# Altium PCB DVM1.PcbDoc
Units mm, origin at the board's own origin, x right, y up, seen from the top; angles counter-clockwise.
Board outline 50.04 x 49.91 mm, 4 copper layers (Top Layer, Layer 1, Layer 2, Bottom Layer), stack 0.603 mm thick; 69 components, 40 nets, 195 pads, 121 vias.
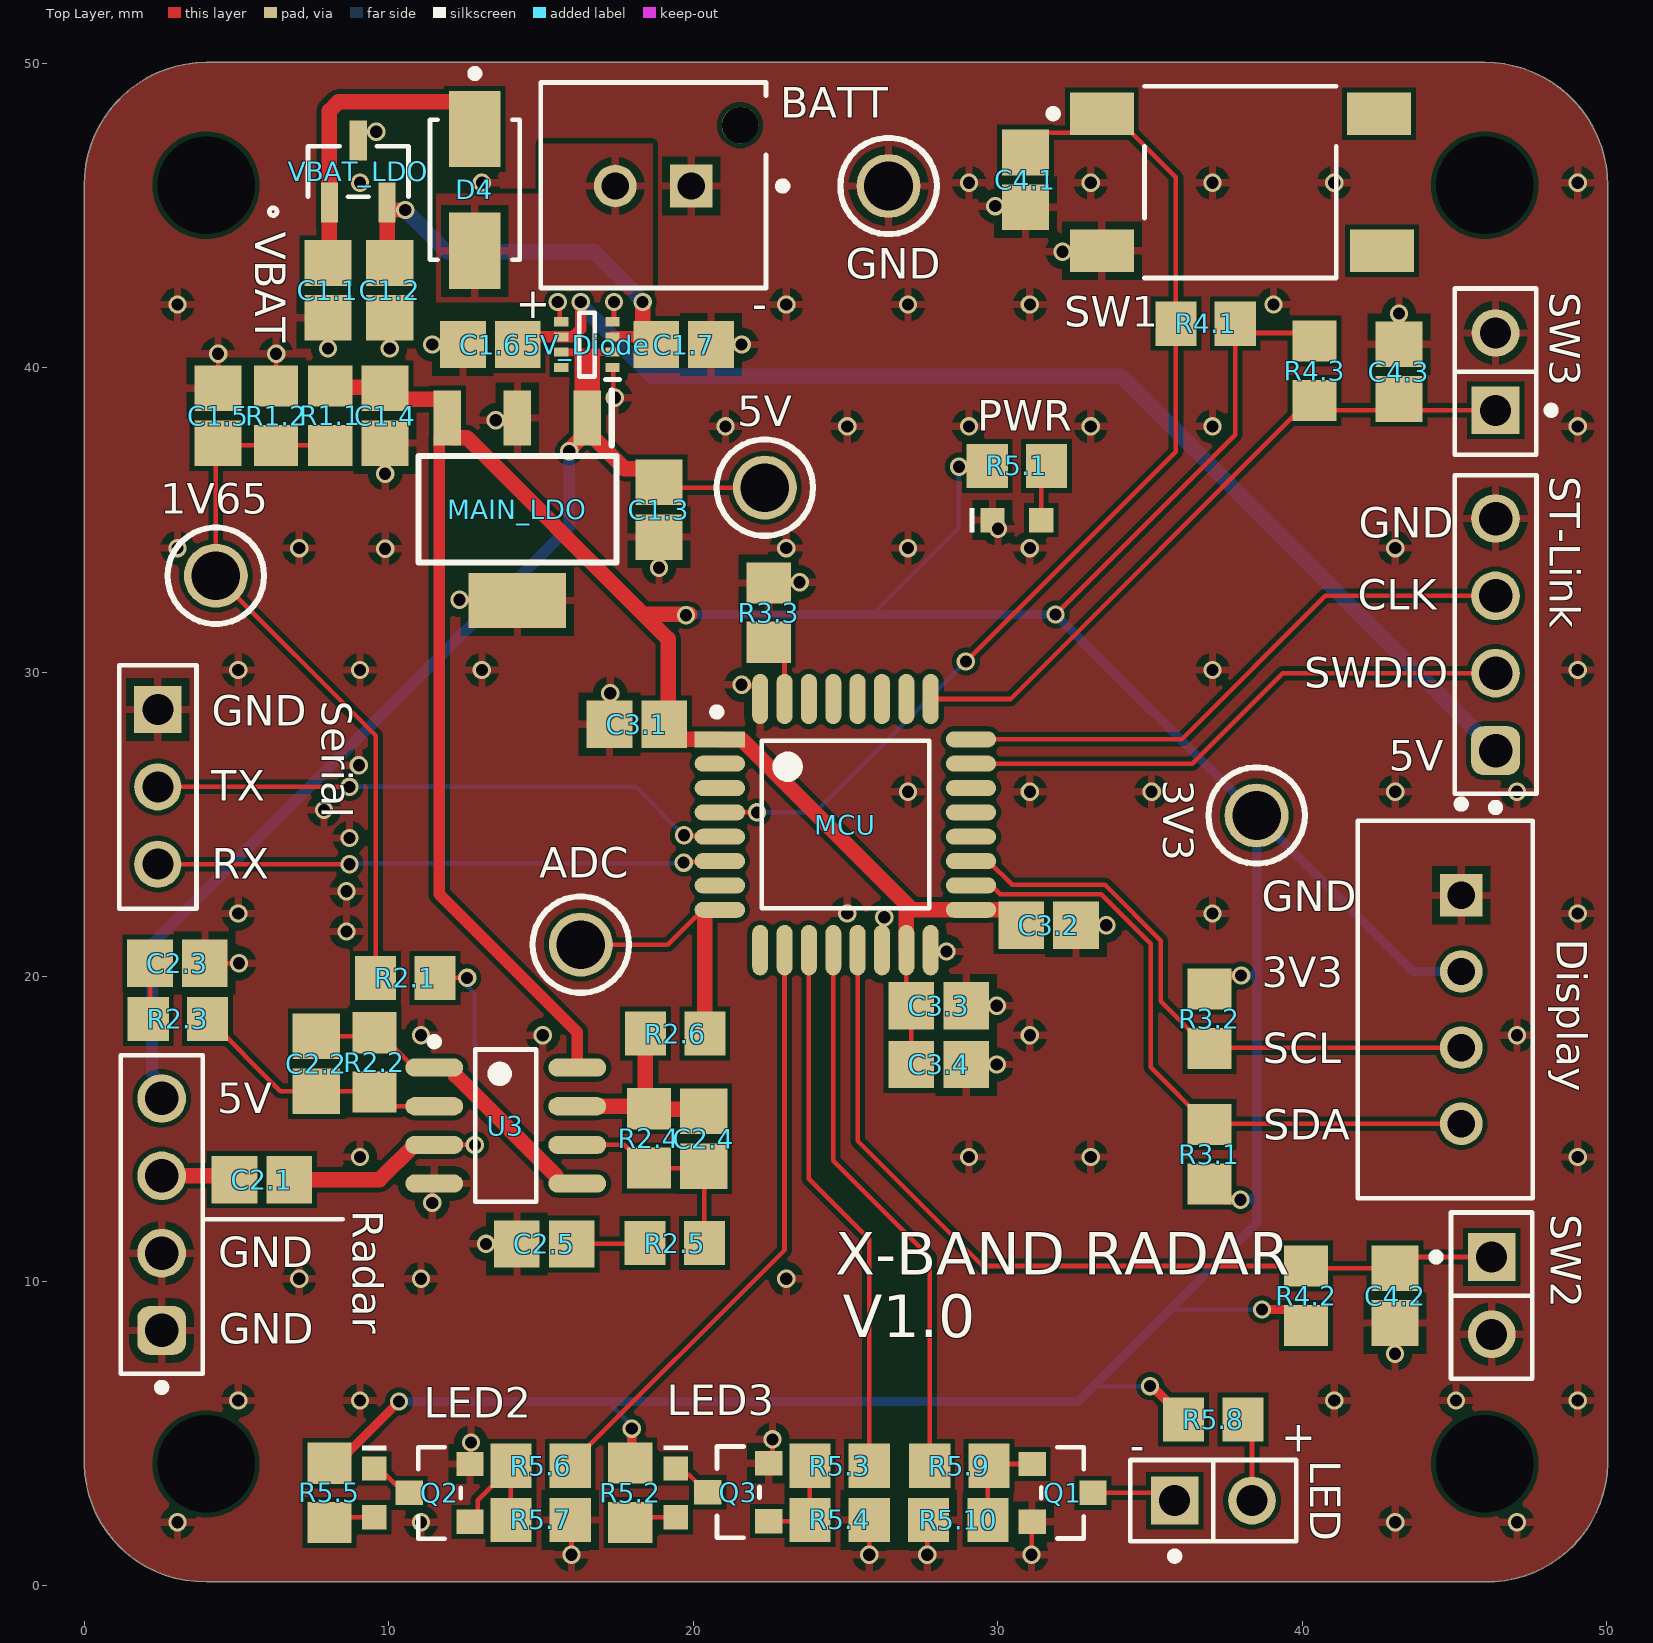
[diagram p0: Top Layer view]
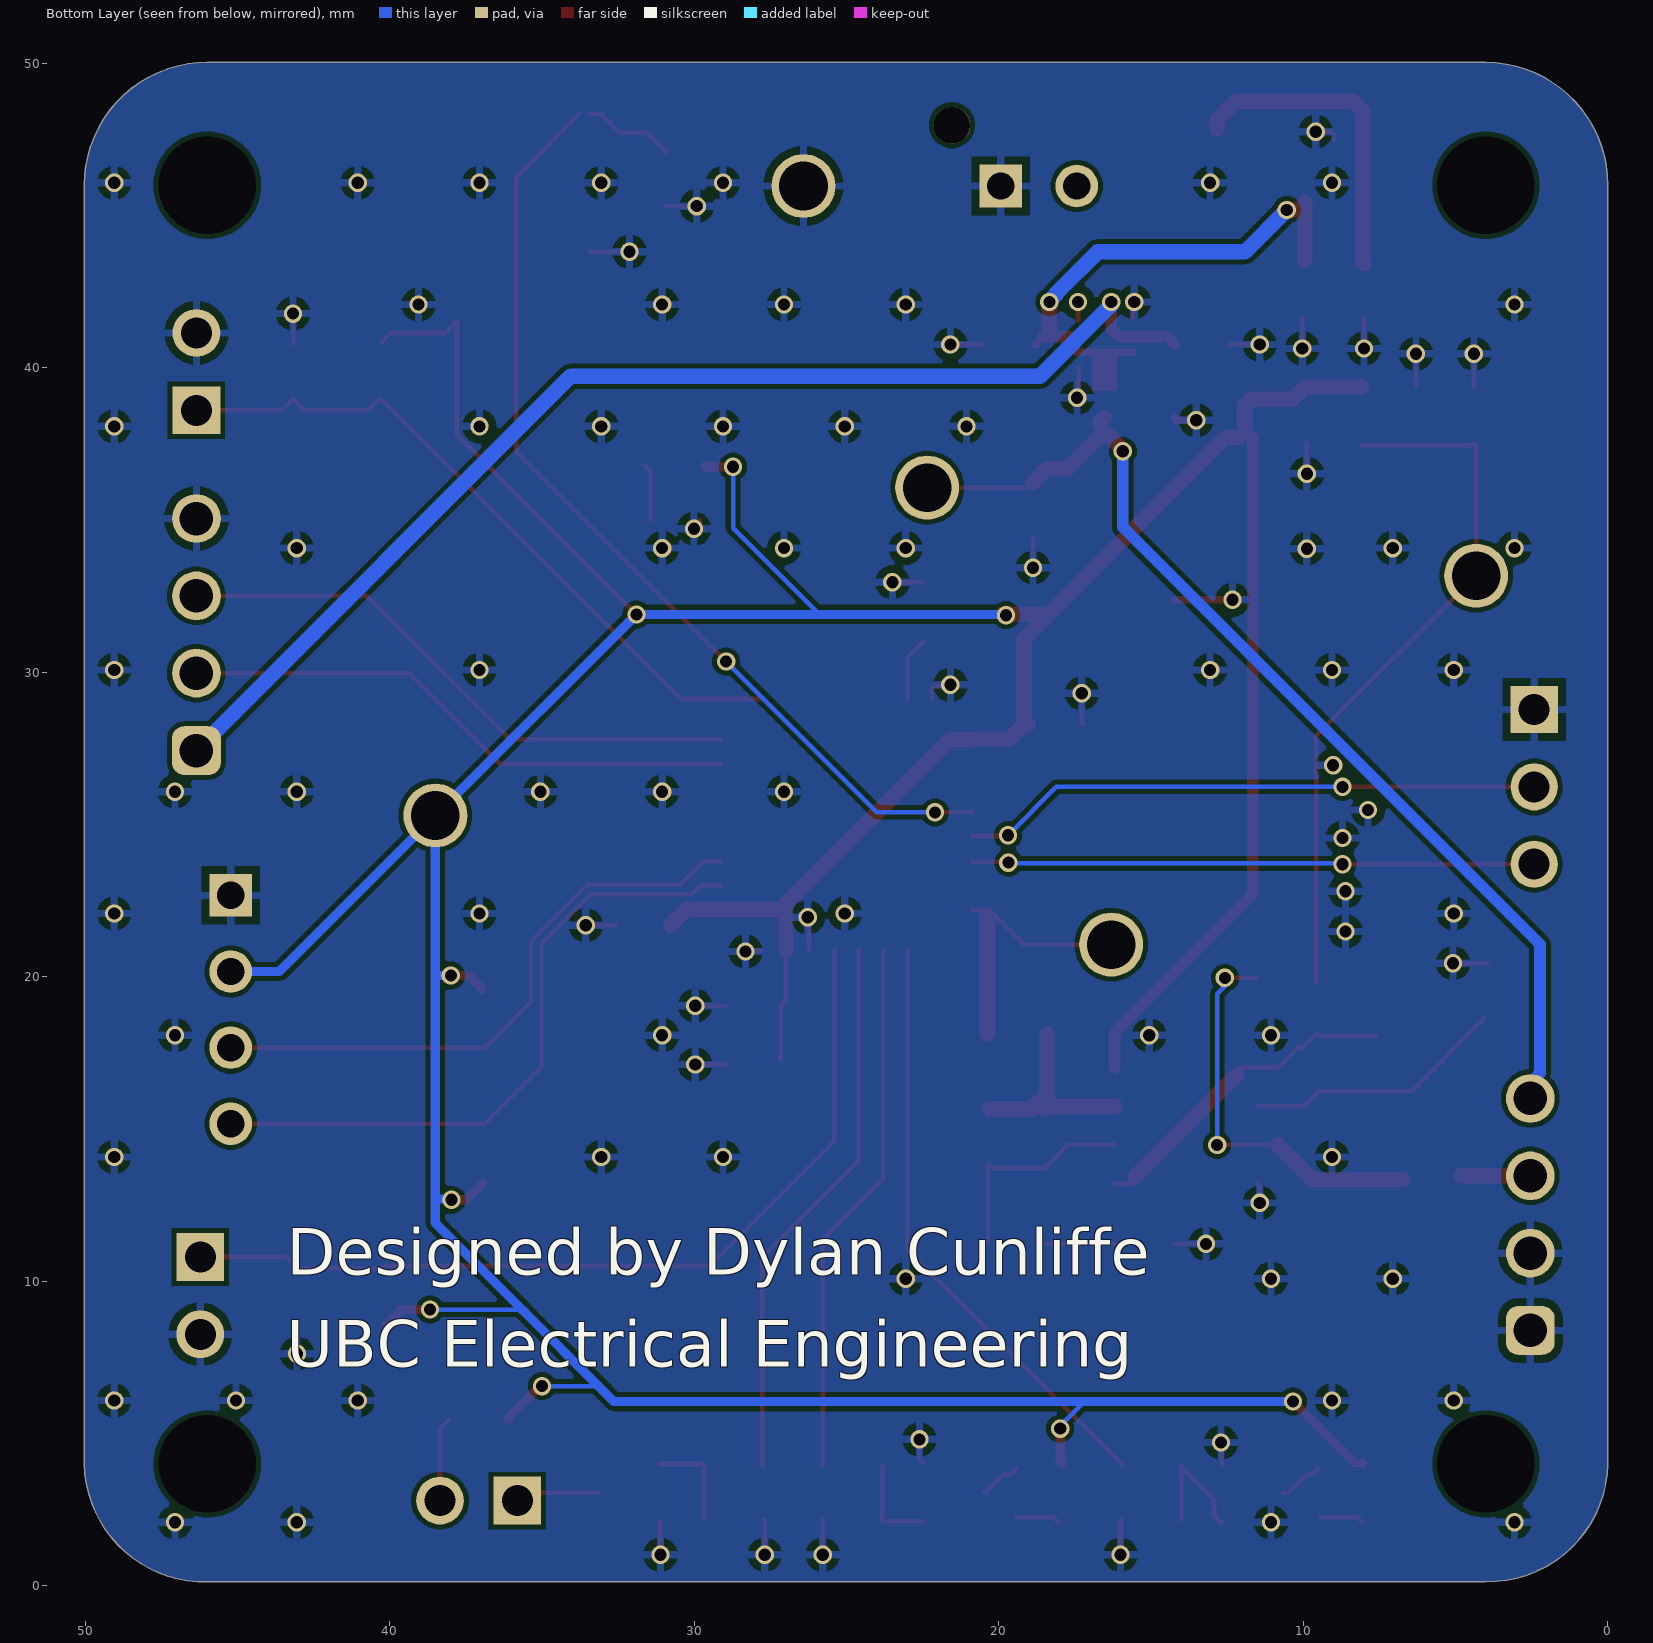
[diagram p1: Bottom Layer view, seen from below]
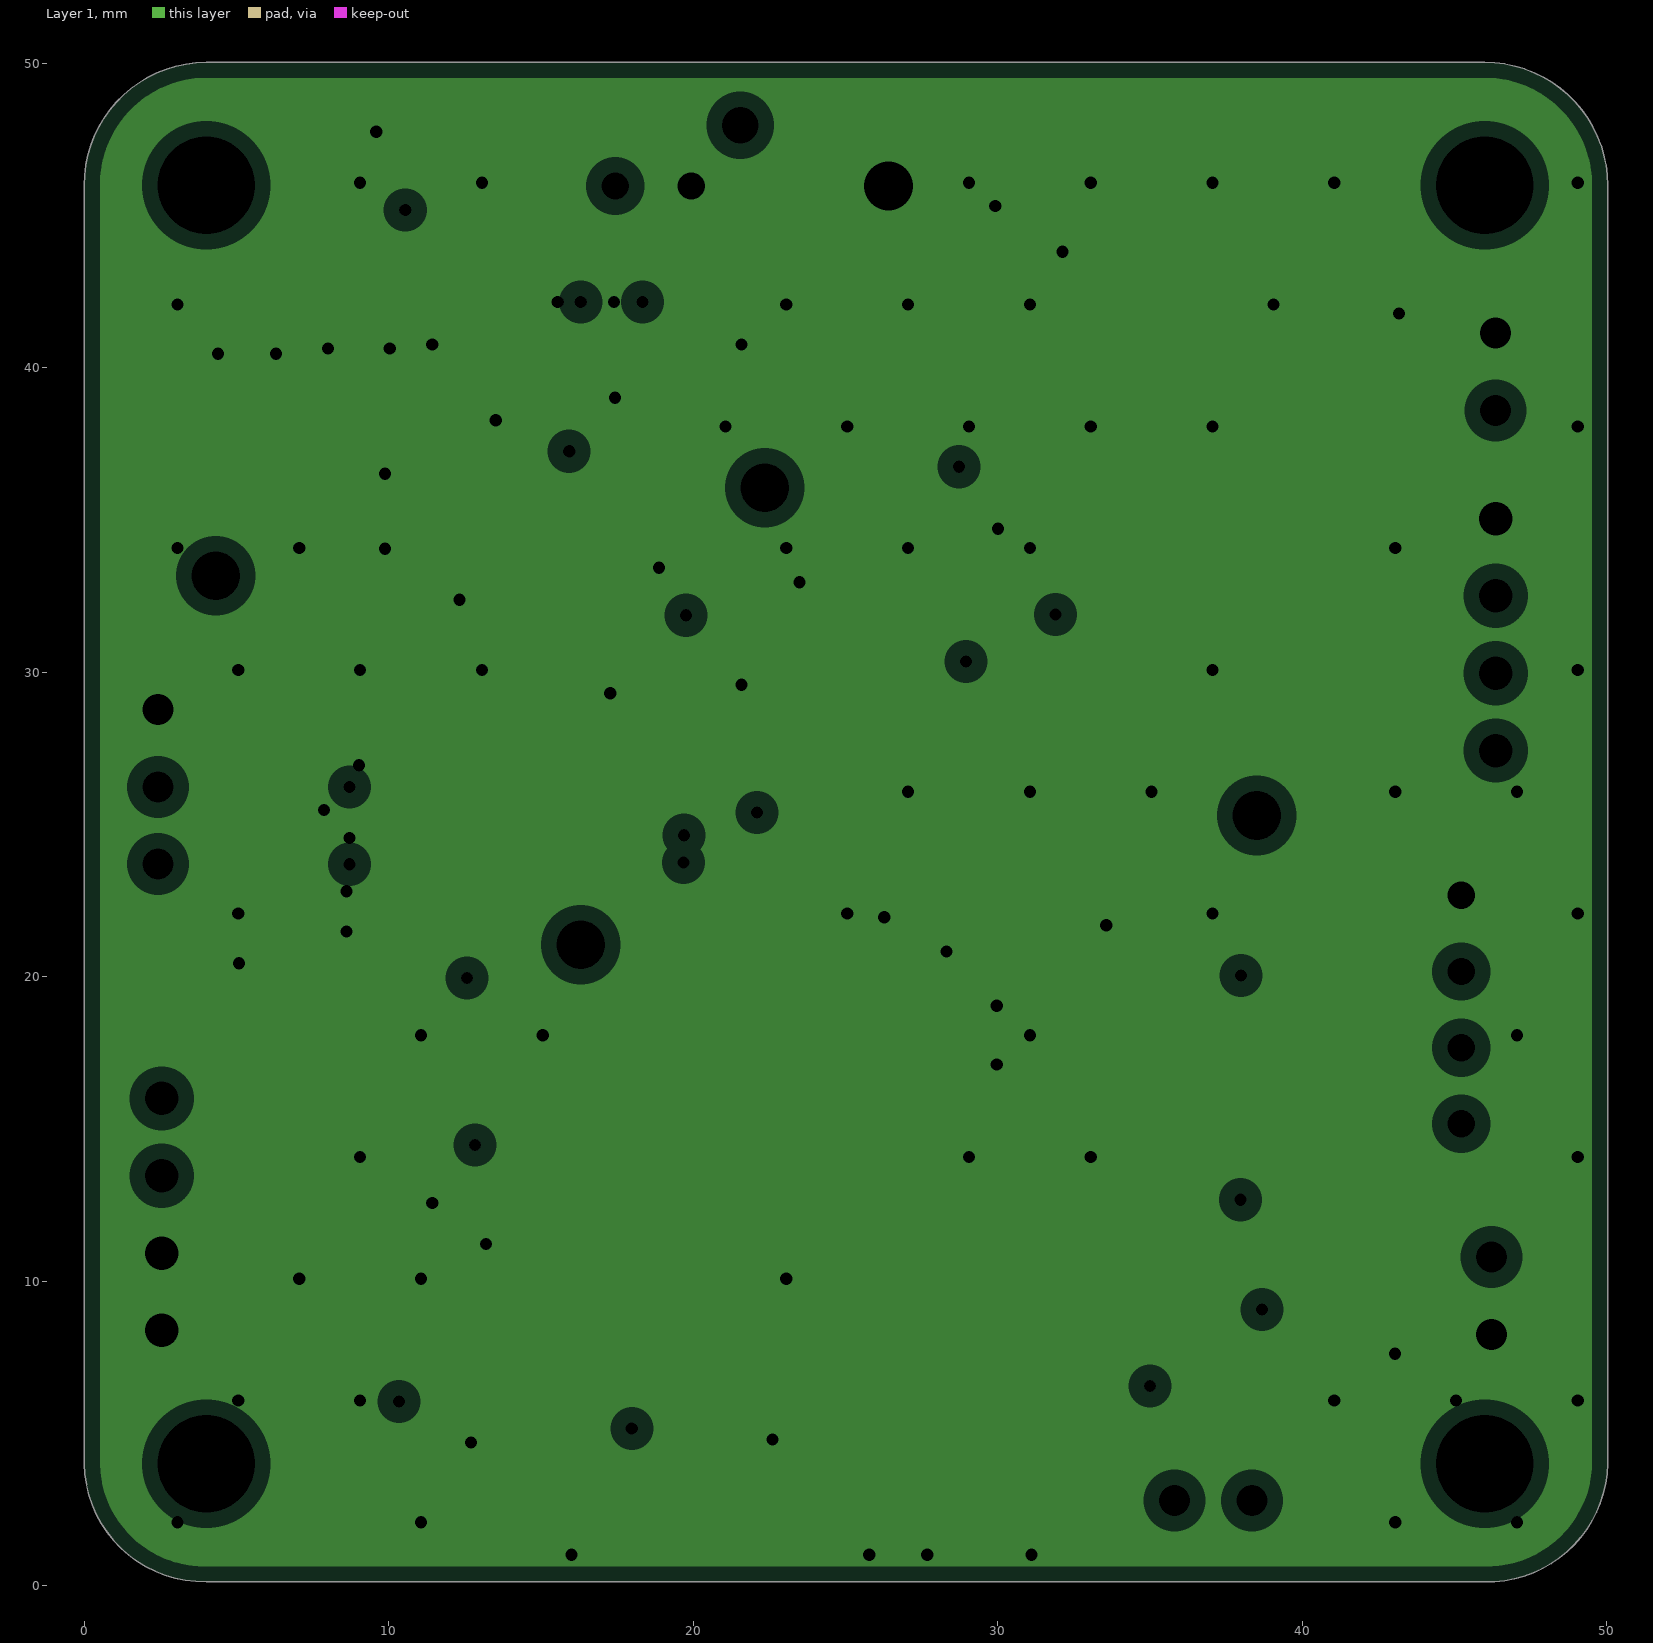
[diagram p2: Layer 1, clearances drawn from the general rule]
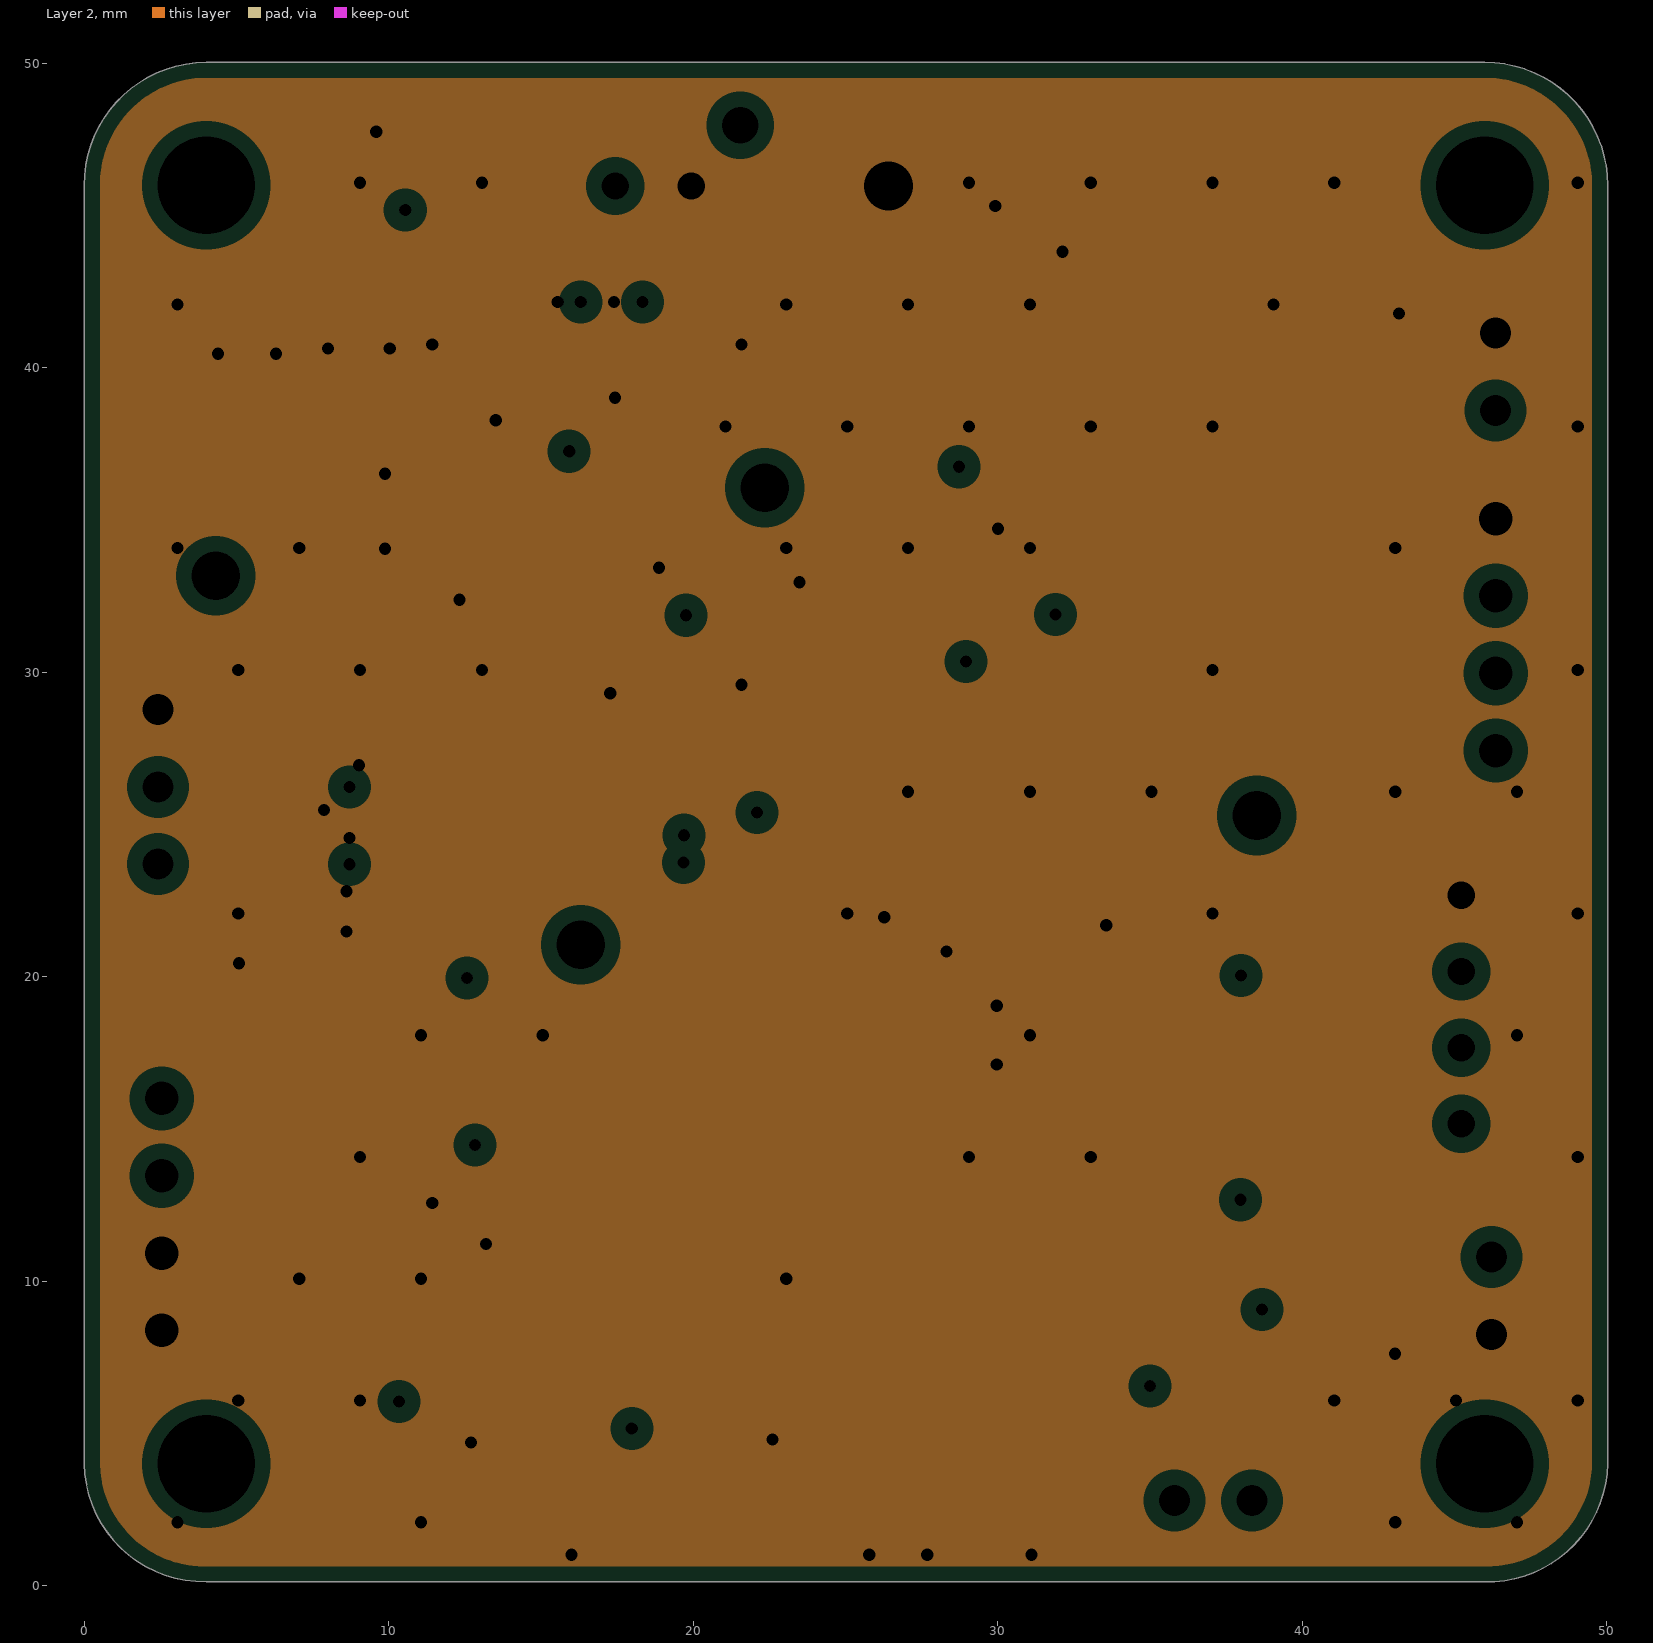
[diagram p3: Layer 2, clearances drawn from the general rule]
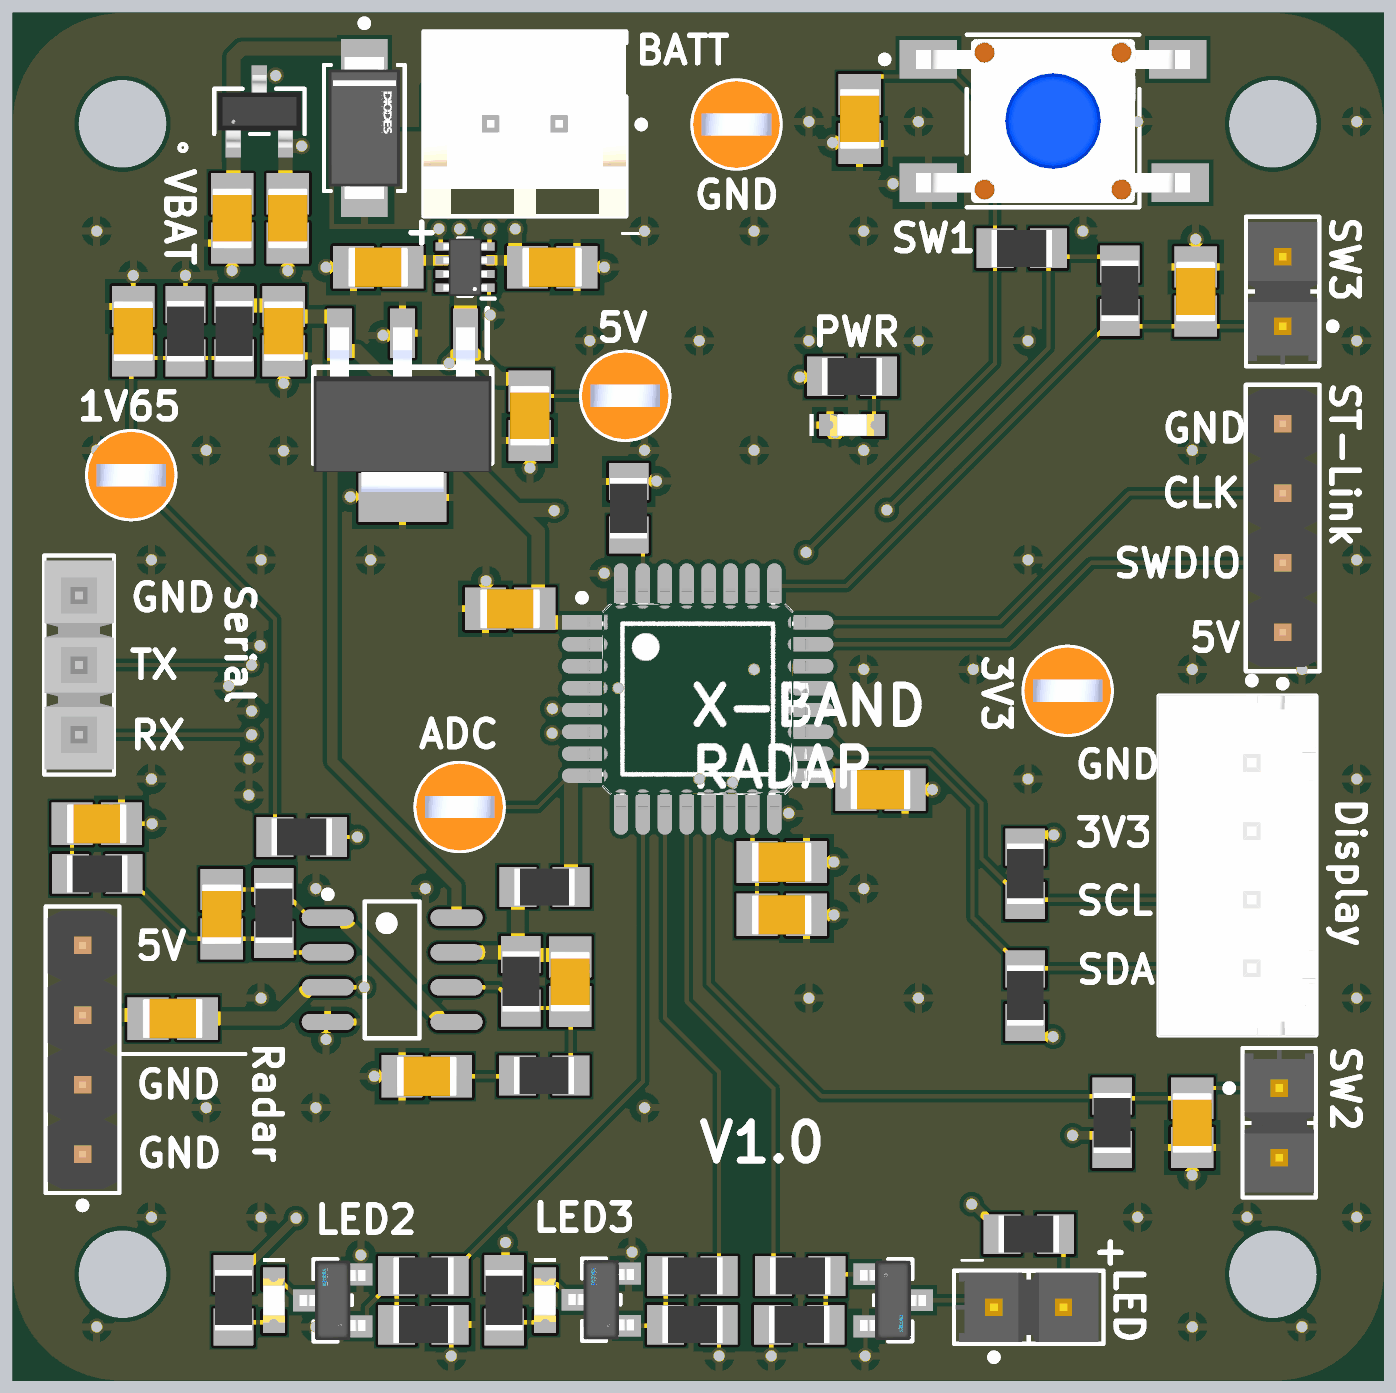
[diagram p4: 3D render of the assembled board from above, using the file's embedded part models]

## Layer stack, top to bottom
Top Solder: solder mask 0.0102, Solder Resist, Dk 3.5
Top Layer: signal copper 0.0356
Dielectric 2: prepreg 0.0711, PP-006, Dk 4.1
Layer 1: plane copper 0.035, net GND
Dielectric 1: dielectric 0.32, FR-4, Dk 4.8
Layer 2: plane copper 0.035, net GND
Dielectric 3: prepreg 0.0711, PP-006, Dk 4.1
Bottom Layer: signal copper 0.0356
Bottom Solder: solder mask 0.0102, Solder Resist, Dk 3.5

## Board outline
0,4 ccw(c3.936,4.063) 4,0.127 46,0.127 ccw(c46.082,4.082) 50.038,4 50.038,46 ccw(c46,46) 46,50.038 4,50.038 ccw(c4.019,46.019) 0,46

## Design rules (kind name [scope] priority, off if disabled: settings)
Clearance [All] p1: gap=0.152 ignorepadtopadclearanceinfootprint=FALSE
HoleSize [All] p1: absolutevalues=TRUE maxlimit=10 minlimit=0.025 maxpercent=80.000 minpercent=20.000
MinimumSolderMaskSliver [All] p1: minsoldermaskwidth=0.08
PlaneClearance [All] p1: clearance=0.508
PlaneConnect [All] p1: planeconnectstyle=Relief reliefexpansion=0.508 reliefentries=4 reliefconductorwidth=0.254 reliefairgap=0.254
PolygonConnect [All] p1: connectstyle=Relief reliefconductorwidth=0.254 reliefentries=4 polygonreliefangle="90 Angle" airgapwidth=0.254
RoutingVias [All] p1: holewidth=0.3 width=0.6 viastyle="Through Hole" minholewidth=0.711 minwidth=1.27 maxholewidth=3.2 maxwidth=4
SilkToSolderMaskClearance [IsPad] p1: minsilkscreentomaskgap=0.15 clearancetoexposedcopper=TRUE
SolderMaskExpansion [All] p1: expansion=0.102 istentingtop=FALSE
SupplyNets "Schematic Supply Nets_4" [InNet('+3.3')] p1: voltage=0.000
SupplyNets "Schematic Supply Nets_3" [InNet('+5')] p2: voltage=0.000
SupplyNets "Schematic Supply Nets_2" [InNet('GND')] p3: voltage=0.000
SupplyNets "Schematic Supply Nets_1" [InNet('VBAT')] p4: voltage=0.000
SupplyNets "Schematic Supply Nets" [InNet('+1.65')] p5: voltage=0.000
Width [All] p1: maxlimit=0.508 minlimit=0.127 preferedwidth=0.305
25 further rules are at their usual default settings.

## Components (designator, comment, footprint, x,y, rotation, side; value= is the part's Value field where it differs from the comment)
1V65 "5013" KSTN-5013_V 4.318,33.172 r180 top (schematic designator 1.65V)
3V3 "5013" KSTN-5013_V 38.506,25.298 r0 top (schematic designator 3.3V)
5V "5013" KSTN-5013_V 22.352,36.068 r0 top
5V_Diode "LM66200DRLR" LM66200DRLR-Footprint-1 16.51,40.767 r180 top
ADC "5013" KSTN-5013_V 16.307,21.057 r0 top
BATT "BH2B-XH-2(LF)(SN)" FP-BH2B-XH-2_LF_SN-MFG 18.689,45.999 r0 top
C1.1 "CAP-NP-2" CAPC2013X145X50ML20T25 8.001,42.545 r90 top value=1µF
C1.2 "CAP-NP-2" CAPC2013X145X50ML20T25 10.033,42.545 r90 top value=1µF
C1.3 "CAP-NP-2" CAPC2013X145X50ML20T25 18.872,35.342 r90 top value=1µF
C1.4 "CAP-NP-2" CAPC2013X145X50ML20T25 9.881,38.43 r90 top value=1µF
C1.5 "CAP-NP-2" CAPC2013X145X50ML20T25 4.394,38.43 r270 top value=10µF
C1.6 "CAP-NP-2" CAPC2013X145X50ML20T25 13.335,40.767 r0 top value=1µF
C1.7 "CAP-NP-2" CAPC2013X145X50ML20T25 19.685,40.767 r180 top value=1µF
C2.1 "CAP-NP-2" CAPC2013X145X50ML20T25 5.831,13.335 r180 top value=0.1µF
C2.2 "CAP-NP-2" CAPC2013X145X50ML20T25 7.62,17.145 r270 top value=270pF
C2.3 "CAP-NP-2" CAPC2013X145X50ML20T25 3.059,20.447 r0 top value=10µF
C2.4 "CAP-NP-2" CAPC2013X145X50ML20T25 20.345,14.681 r270 top value=270pF
C2.5 "CAP-NP-2" CAPC2013X145X50ML20T25 15.108,11.227 r180 top value=10µF
C3.1 "CAP-NP-2" CAPC2013X145X50ML20T25 18.15,28.296 r180 top value=0.1µF
C3.2 "CAP-NP-2" CAPC2013X145X50ML20T25 31.674,21.692 r0 top value=0.1µF
C3.3 "CAP-NP-2" CAPC2013X145X50ML20T25 28.067,19.05 r0 top value=0.1µF
C3.4 "CAP-NP-2" CAPC2013X145X50ML20T25 28.067,17.12 r0 top value=1µF
C4.1 "CAP-NP-2" CAPC2013X145X50ML20T25 30.912,46.177 r270 top value=0.1µF
C4.2 "CAP-NP-2" CAPC2013X145X50ML20T25 43.053,9.525 r270 top value=0.1µF
C4.3 "CAP-NP-2" CAPC2013X145X50ML20T25 43.18,39.878 r270 top value=0.1µF
D4 "B140AF-13" FP-SMAF-MFG 12.827,45.847 r270 top
Display "B4B-XH-A(LF)(SN)" FP-B4B-XH-A_LF_SN-MFG 44.704,18.923 r90 top
GND "5013" KSTN-5013_V 26.416,45.974 r180 top (schematic designator Ground)
LED "TSW-102-14-G-S" FP-TSW-102-14-G-S-MFG 37.084,2.794 r0 top
LED2 "150060VS75000" WL-SMCW_0603_150060xx75000 9.525,3.046 r270 top
LED3 "150060VS75000" WL-SMCW_0603_150060xx75000 19.431,3.048 r270 top
MAIN_LDO "AP7361EA-33ER-13" AP7361EA-33ER-13-Footprint-1 14.224,35.357 r270 top (schematic designator *)
MCU "STM32G431KBT6" FP-LQFP32-5V-IPC_B 25,25 r0 top
PWR "150060VS75000" WL-SMCW_0603_150060xx75000 30.632,35.001 r0 top (schematic designator Power)
Q1 "DMN3023L-7" FP-SOT23-MFG 32.131,3.048 r0 top
Q2 "DMN3023L-7" FP-SOT23-MFG 11.668,3.046 r180 top
Q3 "DMN3023L-7" FP-SOT23-MFG 21.479,3.069 r180 top
R1.1 "RES-2" RESC2013X70X40ML20T20 8.077,38.43 r270 top value=10k
R1.2 "RES-2" RESC2013X70X40ML20T20 6.299,38.43 r270 top value=10k
R2.1 "RES-2" RESC2013X70X40ML20T20 10.541,19.964 r180 top value=16.2k
R2.2 "RES-2" RESC2013X70X40ML20T20 9.525,17.186 r90 top value=174k
R2.3 "RES-2" RESC2013X70X40ML20T20 3.073,18.618 r0 top value=1k
R2.4 "RES-2" RESC2013X70X40ML20T20 18.542,14.691 r90 top value=174k
R2.5 "RES-2" RESC2013X70X40ML20T20 19.39,11.252 r0 top value=1k
R2.6 "RES-2" RESC2013X70X40ML20T20 19.406,18.136 r180 top value=1k
R3.1 "RES-2" RESC2013X70X40ML20T20 36.957,14.173 r90 top value=4.7k
R3.2 "RES-2" RESC2013X70X40ML20T20 36.957,18.618 r90 top value=4.7k
R3.3 "RES-2" RESC2013X70X40ML20T20 22.479,31.963 r270 top value=10k
R4.1 "RES-2" RESC2013X70X40ML20T20 36.83,41.453 r180 top value=10k
R4.2 "RES-2" RESC2013X70X40ML20T20 40.132,9.525 r270 top value=10k
R4.3 "RES-2" RESC2013X70X40ML20T20 40.411,39.903 r270 top value=10k
R5.1 "RES-2" RESC2013X70X40ML20T20 30.632,36.779 r0 top value=1k
R5.2 "RES-2" RESC2013X70X40ML20T20 17.932,3.048 r270 top value=330
R5.3 "RES-2" RESC2013X70X40ML20T20 24.806,3.936 r180 top value=1k
R5.4 "RES-2" RESC2013X70X40ML20T20 24.806,2.158 r0 top value=10k
R5.5 "RES-2" RESC2013X70X40ML20T20 8.052,3.046 r270 top value=330
R5.6 "RES-2" RESC2013X70X40ML20T20 14.986,3.936 r180 top value=1k
R5.7 "RES-2" RESC2013X70X40ML20T20 14.986,2.158 r0 top value=10k
R5.8 "RES-2" RESC2013X70X40ML20T20 37.084,5.461 r0 top value=330
R5.9 "RES-2" RESC2013X70X40ML20T20 28.743,3.937 r0 top value=1k
R5.10 "RES-2" RESC2013X70X40ML20T20 28.702,2.159 r180 top value=10k
Radar "61300411121" 61300411121 2.54,12.192 r90 top
Serial "TSW-103-07-G-S" SMTC-TSW-103-07-X-S 2.413,28.778 r270 top
ST-Link "61300411121" 61300411121 46.355,31.242 r90 top
SW1 "2-1977223-2" FP-2-1977223-2-MFG 37.973,46.101 r90 top
SW2 "TSW-102-14-G-S" FP-TSW-102-14-G-S-MFG 46.228,9.525 r270 top
SW3 "TSW-102-14-G-S" FP-TSW-102-14-G-S-MFG 46.355,39.878 r90 top
U3 "MCP6002-E/SN" SOIC-SN8_L 13.843,15.113 r0 top
VBAT_LDO "AP7375-50SA-7" SOT23_DIO 8.997,46.453 r0 top

## Footprints (in the part's own frame and the unit in brackets; to place one, negate y for a bottom-side part, rotate by r counter-clockwise, add the part's x,y. Pads: shape width x height; smd on the part's side, far side on the other; paste and mask are expansions set on the pad)
61300411121 [mm] "Pin Header, pitch 2.54 mm, THT, Vertical, single row, 4p"
  rrect50% 1.6x1.6 hole 1.1: 1(-3.81,0)
  round 1.6 hole 1.1: 2(-1.27,0) 3(1.27,0) 4(3.81,0)
  silkscreen extent -5.8,-1.35 5.23,1.35, body extent -5.08,-1.27 5.08,1.27, height 8.57
AP7361EA-33ER-13-Footprint-1 [mm]
  rect 1.8x0.9 smd: 1(-3,2.3) 2(-3,0) 3(-3,-2.3)
  rect 1.8x3.2 smd: 4(3,0)
  silkscreen extent -3.9,-3.25 1.75,3.25, body extent -3.23,-3.25 3.88,3.25, height 1.66
CAPC2013X145X50ML20T25 [mm] "Chip Capacitor, 2-Leads, Body 2.2x1.45mm, IPC Low Density"
  rect 1.5x1.55 smd: 1(-0.9,0) 2(0.9,0)
  body extent -1.1,-0.72 1.1,0.73, height 1.45
FP-2-1977223-2-MFG [mm]
  rect 1.4x2.1 smd paste+0 mask+0: 1(2.25,4.55) 2(2.25,-4.55) 3(-2.25,4.55) 4(-2.25,-4.65)
  silkscreen extent -3.15,-3.15 3.15,6.27, body extent -3.25,-5.8 3.25,5.7, height 0.25
FP-B4B-XH-A_LF_SN-MFG [mm]
  rect 1.4x1.4 hole 0.9 paste-2539.97 mask+0: 1(3.75,-0.525)
  round 1.4 hole 0.9 paste-2539.97 mask+0: 2(1.25,-0.525) 3(-1.25,-0.525) 4(-3.75,-0.525)
  silkscreen extent -6.2,-2.88 6.87,2.88, body extent -6.3,-2.98 6.3,2.98, height 0.25
FP-BH2B-XH-2_LF_SN-MFG [mm]
  rect 1.4x1.4 hole 0.9 paste-2539.97 mask+0: 1(1.25,-0.025)
  round 1.4 hole 0.9 paste-2539.97 mask+0: 2(-1.25,-0.025)
  round 1.2 hole 1.2 unplated paste-2539.97 mask+0: ""(2.85,1.975)
  silkscreen extent -3.7,-3.37 4.38,3.37, body extent -3.8,-3.47 3.8,3.47, height 0.25
FP-LQFP32-5V-IPC_B [mm]
  rect 1.655x0.526 smd paste+0 mask+0: 1(-4.125,2.8)
  rrect100% 1.655x0.526 smd paste+0 mask+0: 2(-4.125,2) 3(-4.125,1.2) 4(-4.125,0.4) 5(-4.125,-0.4) 6(-4.125,-1.2) 7(-4.125,-2) 8(-4.125,-2.8) 17(4.125,-2.8) 18(4.125,-2) 19(4.125,-1.2) 20(4.125,-0.4) 21(4.125,0.4) 22(4.125,1.2) 23(4.125,2) 24(4.125,2.8)
  rrect100% 0.526x1.655 smd paste+0 mask+0: 9(-2.8,-4.125) 10(-2,-4.125) 11(-1.2,-4.125) 12(-0.4,-4.125) 13(0.4,-4.125) 14(1.2,-4.125) 15(2,-4.125) 16(2.8,-4.125) 25(2.8,4.125) 26(2,4.125) 27(1.2,4.125) 28(0.4,4.125) 29(-0.4,4.125) 30(-1.2,4.125) 31(-2,4.125) 32(-2.8,4.125)
  silkscreen extent -4.35,-2.75 2.75,3.82, body extent -5.2,-5.2 5.2,5.2, height 0.25
FP-SMAF-MFG [mm]
  rect 2.5x1.7 smd paste+0 mask+0: 1(-2,0) 2(2,0)
  silkscreen extent -3.95,-1.48 2.3,1.48, body extent -3.35,-1.58 3.35,1.58, height 0.25
FP-SOT23-MFG [mm]
  rect 0.9x0.8 smd paste+0 mask+0: 1(-1,0.95) 2(-1,-0.95) 3(1,0)
  silkscreen extent -0.7,-1.5 0.7,1.5, body extent -1.55,-1.6 1.55,1.6, height 0.25
FP-TSW-102-14-G-S-MFG [mm]
  rect 1.57x1.57 hole 1.02 paste-2539.97 mask+0: 1(-1.27,0)
  round 1.57 hole 1.02 paste-2539.97 mask+0: 2(1.27,0)
  silkscreen extent -2.73,-1.95 2.73,1.34, body extent -2.83,-1.44 2.83,1.44, height 0.25
KSTN-5013_V [mm] "Test Point, Dia 3.17mm"
  round 2.1 hole 1.6: 1(0,0)
  silkscreen extent -1.59,-1.58 1.59,1.58, body extent -1.59,-1.59 1.59,1.59, height 8.13
LM66200DRLR-Footprint-1 [mm]
  rect 0.475x0.3 smd: 1(-0.838,0.75) 2(-0.838,0.25) 3(-0.838,-0.25) 4(-0.838,-0.75) 5(0.838,-0.75) 6(0.838,-0.25) 7(0.838,0.25) 8(0.838,0.75)
  silkscreen extent -1.07,-1.05 0.25,1.15, body extent -0.8,-1.05 0.8,1.05, height 0.61
RESC2013X70X40ML20T20 [mm] "Chip Resistor, 2-Leads, Body 2.2x1.35mm, IPC Low Density"
  rect 1.35x1.45 smd: 1(-0.975,0) 2(0.975,0)
  body extent -1.1,-0.67 1.1,0.67, height 0.7
SMTC-TSW-103-07-X-S [mm] ".025 SQ Post Terminal Strip Assembly, 1x3 Pins, Vertical, 2.54mm Pitch, Male"
  rect 1.55x1.55 hole 1.02: 1(0,0)
  round 1.55 hole 1.02: 2(2.54,0) 3(5.08,0)
  silkscreen extent -1.46,-1.27 6.54,1.27, body extent -1.27,-1.27 6.35,1.27, height 8.38
SOIC-SN8_L [mm] "SOIC, 8-Leads, Body 4.9x3.9mm, Pitch 1.27mm, IPC High Density"
  oval 1.9x0.6 smd: 1(-2.35,1.905) 2(-2.35,0.635) 3(-2.35,-0.635) 4(-2.35,-1.905) 5(2.35,-1.905) 6(2.35,-0.635) 7(2.35,0.635) 8(2.35,1.905)
  silkscreen extent -2.47,-2.5 1,2.88, body extent -2,-2.5 2,2.5, height 1.75
SOT23_DIO [mil]
  rect 22x52 smd paste+0 mask+0: 1(-37.4,-40) 2(37.4,-40) 3(0,40)
  silkscreen extent -115,-57 65,32, body extent -60,-52 60,52, height 44
WL-SMCW_0603_150060xx75000 [mm] "SMD Mono-color Chip LED, body 1.60 x 0.80 mm"
  rect 0.8x0.8 smd: 1(-0.8,0) 2(0.8,0)
  silkscreen extent -1.55,-0.4 -1.4,0.4, body extent -0.8,-0.4 0.8,0.4, height 0.7

## Part data
1V65 3V3 5V ADC GND: library part CMP-1672-00005-4, "Test Point, Orange, Through Hole, RoHS, Bulk", Colour=Orange, Manufacturer=Keystone, Package Quantity=100, ComponentLink1Description="Manufacturer URL", ComponentLink1URL=http://www.keyelco.com/, ComponentLink2Description=Datasheet, ComponentLink2URL=http://www.keyelco.com/product-pdf.cfm?p=1322, Contact Material=Bronze, Contact Plating=Silver, DatasheetVersion="Rev. F, 12/2013", Height="8.12 mm", Mount="Through Hole", Mounting Technology="Through Hole", PackageDescription="1-Pin Through Hole Device, Dia 3.17 mm", PackageReference=5013, Packaging=Bulk, REACH SVHC="No SVHC", RoHSCompliant=True
5V_Diode: library part CMP-004-00031-1, "1.6-V to 5.5-V, 40-mΩ, 2.5-A, low-IQ, dual ideal diode 8-SOT-5X3 -40 to 125", Pins=8
BATT: library part CMP-17439-000730-1, "CONN HEADER VERT 2POS 2.5MM", Flammability Rating="UL94 V-0", Insulation Color=Natural, Max Operating Temperature=85°C, Min Operating Temperature=-25°C, Voltage Rating (AC)=250V, Connector Type=Header, Contact Finish - Mating=TIN, Contact Material="Copper Alloy", Contact Shape=Square, Contact Type="Male Pin", Fastening Type=Detent, Insulation Material=Nylon, Lead Free="Lead Free", Mount="Through Hole", Number of Positions=2, Number of Rows=1, Pitch=2.5mm, Series=XH, Termination=Press-Fit
C1.1 C1.2 C1.3 C1.4 C1.5 C1.6 C1.7 C2.1 C2.2 C2.3 C2.4 C2.5 C3.1 C3.2 C3.3 C3.4 C4.1 C4.2 C4.3: library part CMP-001-00010-6, "Chip Capacitor, 1 uF, +/-10%, 25 V, 0805 (2012 Metric)", Capacitor Type=Ceramic, Case/Package=0805, Max Operating Temperature=125°C, Min Operating Temperature=-55°C, Tolerance=10%, Voltage Rating=25V, Mounting Technology=SM, Pins=2, RoHS Compliant=True
D4: library part CMP-12790-000095-1, "DIODE SCHOTTKY 40V 1A SMAF", Average Rectified Current=1A, Max Reverse Voltage (DC)=40V, Mount="Surface Mount", Packaging="Tape and Reel", RoHS Compliant=Yes
Display: library part CMP-17439-000250-1, "CONN HEADER VERT 4POS 2.5MM", Color=Natural, Contact Resistance=20mR, Current Rating=3A, Flammability Rating="UL94 V-0", Housing Color=White, Insulation Resistance=1GR, Max Operating Temperature=85°C, Max Voltage Rating (AC)=250V, Min Operating Temperature=-25°C, Package Quantity=500, Connector Type=Header, Contact Finish - Mating=TIN, Contact Material=Brass, Contact Plating=Tin, Contact Shape=Square, Contact Type="Male Pin", Depth=5.75mm, Fastening Type=Detent, Gender=Male, Housing Material=Polyamide, Insulation Color=Natural, Insulation Material=Nylon, Lead Free="Lead Free", Lead Pitch=2.5mm, Length=12.4mm, Mated Stacking Heights=9.8mm, Material=Polyamide, Max Current Rating=3A, Max Voltage Rating (DC)=250V, Mount="Through Hole", Number of Contacts=4, Number of Positions=4, Number of Rows=1, Orientation=Straight, Packaging=Bulk, Pitch=2.5mm, REACH SVHC="No SVHC", Series=XH, Termination=Solder, Voltage Rating=250V, Voltage Rating (AC)=250V, Wire/Cable Gauge=22AWG
LED SW2 SW3: library part CMP-02766-001740-1, "CONN HEADER VERT 2POS 2.54MM", Color=Black, Flammability Rating="UL94 V-0", Max Current Rating=7.6A, Max Operating Temperature=125°C, Max Voltage Rating (AC)=550V, Min Operating Temperature=-55°C, Package Quantity=1, Connector Type=Header, Contact Finish - Mating=GOLD, Contact Material=Bronze, Contact Mating Length=0.32inch, Contact Plating=Gold, Contact Shape=Square, Contact Type="Male Pin", Depth=2.54mm, Fastening Type=Pull, Gender=Male, Housing Color=Black, Housing Material=Polyester, Insulation Color=Black, Insulation Material=PBT, Lead Free="Lead Free", Length=5.08mm, Mount="Through Hole", Number of Contacts=2, Number of Positions=2, Number of Rows=1, Orientation=Straight, Packaging=Bulk, Pitch=2.54mm, Radiation Hardening=No, REACH SVHC="No SVHC", RoHS Compliant=Yes, Series=TSW, Termination=Solder, Width=2.54mm
LED2 LED3 PWR: library part CMP-1426-00006-7, "WURTH ELEKTRONIK - 150060VS75000 - LED, Green, SMD, 0603, 30 mA, 2 V, 570 nm", Case Code (Imperial)=0603, Case Code (Metric)=1608, Color=Green, Forward Current=100mA, Forward Voltage=2V, Max Junction Temperature (Tj)=95°C, Max Operating Temperature=85°C, Max Reverse Voltage (DC)=5V, Min Operating Temperature=-40°C, Power Dissipation=72mW, Test Current=20mA, Case/Package=0603, Dominant Wavelength=570nm, Height=700µm, Length=1.6mm, Lens Style="Clear, Rectangular", Luminous Intensity=40mcd, Mount="Surface Mount", Number of Pins=2, Packaging="Tape and Reel", Peak Wavelength=572nm, REACH SVHC=Unknown, Reverse Voltage=5V, RoHS=Compliant, Viewing Angle=140°, Wavelength=570nm, Width=800µm
MAIN_LDO: library part CMP-019-00049-1, "1A Low Dropout Adjustable and Fixed-Mode Regulator with Enable", Max Operating Temperature=85°C, Max Supply Voltage=6V, Min Operating Temperature=-40°C
MCU: library part CMP-12105-000140-1, "IC MCU 32BIT 128KB FLASH 32LQFP"
Q1 Q2 Q3: library part CMP-12801-000035-1, "MOSFET N-CH 30V 6.2A SOT23", Continuous Drain Current=6.2A, Drain To Source Breakdown Voltage=30V, Drain To Source Resistance=25mΩ, Gate To Source Voltage=20V, Input Capacitace At Vds="873pF @ 15V", Manufacturer="Diodes Inc.", Max Forward Diode Voltage=1.2V, Max Junction Temp=+150°C, Package=SOT23, Power Dissipation=0.9W, Pulse Drain Current=44A, Temperature="-55°C to +150°C", Temperature Range Low=-55°C, Automotive=Yes, Automotive Grade="Grade 0", Category=Trans, ComponentLink2Description=Datasheet, ComponentLink2URL=https://www.diodes.com/assets/Datasheets/DMN3023L.pdf, Depletion Mode=False, Device Class L1="Discrete Semiconductors", Device Class L2=Transistors, Device Class L3=MOSFETs, Digikey Description="MOSFET N-CH 30V 6.2A SOT23", Drain To Source Voltage=30V, Footprint Url=https://www.diodes.com/assets/Package-Files/SOT23.pdf, Gate Charge At Vgs="18.4nC @ 10V", Height=1.1mm, Lead Free=Yes, Manufacturer Part Number=DMN3023L-7, Mouser Description="MOSFET N-Ch Enh Mode FET 30Vdss 20Vgss 51A", Number Of Channels=1, Number Of N Channels=1, Octopart=https://octopart.com/dmn3023l-7-diodes+inc.-65294126, RoHS=TRUE, Rthja Max=97°C/W, Standoff Height=0.013mm, Temperature Range High=+150°C, Threshold Vgs Max=1.8V, Threshold Vgs Min=0.8V, Turn Off Delay Time=231ns, Turn On Delay Time=17ns
R1.1 R1.2 R2.1 R2.2 R2.3 R2.4 R2.5 R2.6 R3.1 R3.2 R3.3 R4.1 R4.2 R4.3 R5.1 R5.2 R5.3 R5.4 R5.5 R5.6 R5.7 R5.8 R5.9 R5.10: library part CMP-009-00010-5, "Chip Resistor, 1 KOhm, +/- 1%, 0.125 W, -55 to 155 degC, 0805 (2013 Metric)", Case/Package=0805, Max Operating Temperature=155°C, Min Operating Temperature=-55°C, Power=125mW, Tolerance=1%, Voltage Rating=150V, Mounting Technology=SM, Pins=2, RoHS Compliant=True
Radar ST-Link: library part CMP-1502-01064-4, "THT Vertical Pin Header WR-PHD, Pitch 2.54 mm, Single Row, 4 pins", Color=Black, Contact Resistance=20mΩ, Current Rating=3A, Max Operating Temperature=105°C, Min Operating Temperature=-40°C, Operating Supply Voltage=250V, Connector Type="Male Pin", Contact Material=Gold, Contact Mating Length=5.9944mm, Contact Plating=Gold, Gender=Male, Height=8.89mm, Lead Free="Lead Free", Lead Pitch=2.54mm, Mount="Through Hole", Number of Contacts=4, Number of Pins=4, Number of Positions=4, Number of Rows=1, Orientation=Vertical, Packaging=Bulk, Pitch=2.54mm, RoHS=Compliant, Termination=Solder, Voltage Rating=250V
Serial: library part CMP-1024-00333-1, "0.025\" SQ Post Header, Through-hole, Vertical, -55 to 125 degC, 2.54 mm Pitch, 3-Pin, Male, RoHS", Manufacturer=Samtec, Temperature Range="-55 to 125 degC", ComponentLink1Description="Manufacturer URL", ComponentLink1URL=http://www.samtec.com, ComponentLink2Description=Datasheet, ComponentLink2URL=http://www.samtec.com/documents/webfiles/pdf/TSW_TH.PDF, ComponentLink3Description="Package Specification", ComponentLink3URL=http://www.samtec.com/documents/webfiles/cpdf/TSW-XXX-XX-XXX-X-XX-XXX-MKT.pdf, DatasheetVersion=F-214, Mounting Technology=Through-hole, Orientation=Vertical, PackageDescription=".025[0.64] SQ. Post Terminal Strip Assembly", PackageReference=TSW-103-07-X-S, PackageVersion="DM, 8/1988", PartNumber=TSW-103-07-G-S, Pitch="2.54 mm", RoHS=True
SW1: library part CMP-03407-000026-1, "SWITCH TACTILE SPST-NO 0.05A 24V", RoHS Compliant=Yes
U3: library part CMP-0187-00368-3, "None", Case/Package=SOIC, Input Bias Current=1pA, Input Offset Voltage (Vos)=4.5mV, Max Operating Temperature=125°C, Max Supply Voltage=6V, Min Operating Temperature=-40°C, Min Supply Voltage=1.8V, Nominal Supply Current=100uA, Operating Supply Voltage=5.5V, Output Current=23mA, Package Quantity=100, Power Supply Rejection Ratio (PSRR)=86dB, Voltage Gain=112dB, Amplifier Type="GENERAL PURPOSE", Bandwidth=1MHz, Common Mode Rejection Ratio=60dB, Gain Bandwidth Product=1MHz, Height=1.25mm, Input Offset Voltage-Max=4.5mV, Lead Free="Lead Free", Length=4.9mm, Mount="Surface Mount", Number of Amplifiers=2, Number Of Channels=2, Number of Circuits=2, Number of Elements=2, Number of Pins=8, Packaging=Rail/Tube, Radiation Hardening=No, REACH SVHC="No SVHC", RoHS Compliant=Yes, Slew Rate=0.6V/µs, Slew Rate-Nom=0.6V/µs, Supply Current=100uA, Technology=CMOS, Unity Gain Bandwidth Product=1MHz, Width=3.9mm
VBAT_LDO: "No Description Available", Manufacturer_Name="Diodes Inc", Copyright="Copyright (C) 2026 Ultra Librarian. All rights reserved.", Digi-Key_Part_Number_1=31-AP7375-50SA-7TR-ND, Digi-Key_Part_Number_2=31-AP7375-50SA-7CT-ND, Digi-Key_Part_Number_3=31-AP7375-50SA-7DKR-ND, Manufacturer_Part_Number=AP7375-50SA-7, RefDes=RefDes, Type=Type

## Free pads (board coordinates)
  round 1.524 hole 3.2 unplated: 8(4,46) 9(4,4) 10(46,4) 11(46,46)

## Via types
v1: diameter 0.6, hole 0.4, Top Layer to Bottom Layer, tented both sides, 121 vias

## Nets (pads, with @x,y where several pads share a name; then routed paths per layer and width w, separated by ;. In a path a pad name is that pad's centre, name@x,y a point inside that pad or via, vN(x,y) a via of type N, cw(c..) or ccw(c..) an arc to the next point about the centre after c; other vN are vias at no path point)
5V_BATT: 5V_Diode.3 C1.2.2 C1.7.2 VBAT_LDO.2 | length 14.6
  Top Layer w0.254: C1.2.2@9.947,43.531 C1.2.2 ; VBAT_LDO.2 9.947,45.339 VBAT_LDO.2@10.099,45.187 ; C1.7.2@18.339,41.213 C1.7.2
  Top Layer w0.381: 5V_Diode.3 C1.7.2@18.535,41.017
  Top Layer w0.508: C1.2.2@9.947,43.531 VBAT_LDO.2 ; VBAT_LDO.2@10.099,45.187 v1(10.541,45.187) ; C1.7.2@18.339,41.213 v1(18.339,42.164)
  Bottom Layer w0.508: v1(10.541,45.187) 11.915,43.813 16.749,43.813 18.105,42.457 18.105,42.422 18.339,42.189 v1(18.339,42.164)
5V_STLINK: 5V_Diode.6 C1.6.2 ST-Link.1 | length 39.3
  Top Layer w0.381: C1.6.2 14.485,41.017 5V_Diode.6 ; 5V_Diode.6@15.719,41.024 16.052,41.024 16.307,41.279 v1(16.307,42.164)
  Bottom Layer w0.508: v1(16.307,42.164) 16.324,42.146 16.324,42.045 18.644,39.726 34.061,39.726 ST-Link.1
+1.65: 1V65.1 C1.5.2 R1.1.2 R1.2.2 R2.1.2 | length 23.6
  Top Layer w0.152: R1.1.2 R1.2.2 4.469,37.455 C1.5.2 4.318,37.454 1V65.1 9.566,27.924 R2.1.2@9.566,19.812
+3.3: 3V3.1 C1.4.2 C3.1.1 C3.2.1 C3.3.1 C3.4.1 Display.2 MAIN_LDO.3 MCU.1 MCU.15 MCU.17 R1.1.1 R3.1.1 R3.2.2 R4.1.1 R4.2.2 R4.3.1 R5.1.1 R5.2.1 R5.5.1 R5.8.1 U3.8 | length 174.1
  Top Layer w0.152: MCU.15 27,19.217 C3.3.1 C3.4.1@27.167,17.272 ; v1(31.902,31.902) 37.805,37.805 37.805,41.529 38.186,41.148 39.964,41.148 R4.3.1@40.259,40.853
  Top Layer w0.305: R5.5.1 R5.5.1@8.102,4.021 ; R5.5.1@8.305,4.021 10.329,6.045 v1(10.338,6.045) ; R5.2.1 17.983,4.074 v1(17.983,5.158) ; v1(28.727,36.754) 29.632,36.754 R5.1.1 ; v1(35.001,6.553) 35.067,6.553 36.109,5.511 R5.8.1 ; R3.1.1 37.48,12.676 v1(37.973,12.675) v1(37.973,12.675) ; R3.2.2 37.404,20.041 v1(37.998,20.041) ; v1(38.684,9.068) 39.614,9.068 R4.2.2
  Top Layer w0.381: MAIN_LDO.3@11.659,37.719 11.659,22.708 16.193,18.173 U3.8
  Top Layer w0.508: R1.1.1 8.115,39.368 9.843,39.368 C1.4.2 ; C1.4.2@9.982,39.33 10.349,38.964 11.728,38.964 11.924,38.768 MAIN_LDO.3 ; MAIN_LDO.3@11.924,38.351 11.924,37.907 12.12,37.711 12.564,37.711 18.373,31.902 ; C3.1.1@19.05,28.271 C3.1.1 ; v1@19.888,31.902 18.373,31.902 ; MCU.15 26.997,20.878 26.997,22.389 ; C3.2.1 30.774,21.704 30.278,22.2 MCU.17 27.186,22.2 26.997,22.389 ; 18.373,31.902 19.177,31.098 19.177,28.296 19.673,27.8 MCU.1 20.883,27.791 21.595,27.791 26.997,22.389
  Bottom Layer w0.152: 17.196,6.045 v1@18.085,5.156 ; 25.895,31.902 28.727,34.734 v1(28.727,36.754) ; 33.147,6.553 v1(35.001,6.553) ; 35.662,9.068 v1(38.684,9.068)
  Bottom Layer w0.305: v1(10.338,6.045) 17.196,6.045 32.639,6.045 33.147,6.553 35.573,8.979 ; v1@19.888,31.902 25.895,31.902 v1(31.902,31.902) 3V3.1@38.278,25.527 ; 35.662,9.068 35.573,8.979 ; v1(37.973,12.675) 37.998,12.7 38.506,12.7 ; v1(37.998,20.041) 38.506,20.041 ; Display.2 43.632,20.173 3V3.1 38.506,20.041 ; 35.573,8.979 38.506,11.913 38.506,12.7 ; 38.506,12.7 38.506,20.041
  other v1: 19.761,31.877
+5: 5V.1 5V_Diode.2 5V_Diode.7 C1.3.2 MAIN_LDO.1 Radar.4 | length 34.5
  Top Layer w0.152: C1.3.2@19.047,36.068 5V.1
  Top Layer w0.508: v1(15.926,37.262) 15.926,37.309 16.524,37.907 17.737,36.694 18.421,36.694 C1.3.2 ; MAIN_LDO.1 MAIN_LDO.1@16.679,38.202
  Bottom Layer w0.381: Radar.4 2.307,16.235 2.307,16.751 2.223,16.835 2.223,21.07 15.926,34.773 v1@15.926,37.246
BUTTON2: C4.2.1 MCU.13 R4.2.1 SW2.1 | length 29
  Top Layer w0.152: MCU.13 25.4,14.605 29.505,10.5 R4.2.1 40.207,10.425 C4.2.1 43.423,10.795 SW2.1
"DR IF": C2.1.2 Radar.3 | length 2.4
  Top Layer w0.152: C2.1.2@4.804,13.462 C2.1.2
  Top Layer w0.508: Radar.3 C2.1.2@4.804,13.462
ENABLE_BUTTON: C4.3.2 MCU.25 R4.3.2 SW3.1 | length 23
  Top Layer w0.152: MCU.25 30.431,29.125 40.209,38.903 40.259,38.903 R4.3.2@40.334,38.978 ; R4.3.2 40.732,38.608 42.81,38.608 C4.3.2 43.55,38.608 SW3.1
GND: 5V_Diode.1 5V_Diode.4 5V_Diode.5 BATT.1 C1.1.1 C1.2.1 C1.3.1 C1.4.1 C1.5.1 C1.6.1 C1.7.1 C2.3.2 C2.5.2 C3.1.2 C3.2.2 C3.3.2 C3.4.2 C4.1.2 C4.2.2 C4.3.1 Display.1 GND.1 MAIN_LDO.2 MAIN_LDO.4 MCU.14 MCU.16 MCU.32 PWR.1 Q1.2 Q2.2 Q3.2 R1.2.1 R3.3.1 R5.4.2 R5.7.2 R5.10.2 Radar.1 Radar.2 Serial.1 ST-Link.4 SW1.3 SW2.2 SW3.2 U3.4 VBAT_LDO.3 | length 35.2
  Top Layer w0.152: C2.3.2 v1(5.08,20.447) ; C1.5.1 v1(4.394,40.462) ; R1.2.1 v1(6.299,40.462) ; v1(8.001,40.64) C1.1.1 ; VBAT_LDO.3 8.997,47.671 9.086,47.76 v1(9.59,47.76) ; v1(9.881,36.525) C1.4.1 ; v1(10.033,40.64) C1.2.1 ; v1(11.43,12.573) 11.43,13.145 U3.4 ; v1(11.43,40.767) C1.6.1 ; Q2.2 12.684,4.012 12.684,4.683 v1(12.7,4.699) ; v1(13.192,11.227) C2.5.2 ; v1(15.552,42.168) 15.621,42.099 5V_Diode.5@15.621,41.656 ; R5.7.2 16.002,2.117 v1(16.002,1.016) ; C3.1.2 17.272,28.318 v1(17.272,29.312) ; 5V_Diode.1 17.348,39.974 17.379,39.943 17.379,39.067 v1(17.426,39.019) ; 5V_Diode.4@17.399,41.568 v1(17.399,42.164) ; v1(18.872,33.437) C1.3.1 ; C1.7.1 v1(21.59,40.767) ; v1(21.59,29.591) 21.632,29.549 22.133,29.549 22.2,29.482 MCU.32 ; Q3.2 22.606,4.146 v1(22.606,4.805) ; R3.3.1 22.498,32.957 v1(23.495,32.957) ; v1(25.781,1.016) R5.4.2 ; MCU.14 26.236,20.911 26.236,21.918 v1(26.272,21.954) ; v1(27.686,1.016) 27.686,2.118 R5.10.2 ; MCU.16 27.823,20.851 28.298,20.851 v1(28.321,20.828) ; C3.4.2 v1(29.972,17.12) ; C3.3.2 v1(29.972,19.05) ; PWR.1 29.832,34.892 v1(30.008,34.717) ; v1(29.921,45.314) 30.926,45.314 C4.1.2@30.937,45.303 ; v1(31.115,1.016) 31.123,1.024 31.123,2.09 Q1.2 ; v1(32.131,43.815) 33.387,43.815 SW1.3 ; C3.2.2 v1(33.568,21.692) ; v1(43.053,7.62) C4.2.2 ; C4.3.1 v1(43.18,41.783)
  Top Layer w0.254: v1(12.319,32.385) 14.196,32.385 MAIN_LDO.4 ; v1(13.513,38.278) 14.145,38.278 MAIN_LDO.2
  other v1: 3.058,2.08 11.058,2.08 43.058,2.08 47.058,2.08 5.058,6.08 9.058,6.08 41.058,6.08 45.058,6.08 49.058,6.08 7.058,10.08 11.058,10.08 23.058,10.08 9.058,14.08 29.058,14.08 33.058,14.08 49.058,14.08 11.058,18.08 15.058,18.08 31.058,18.08 47.058,18.08 8.611,21.488 5.058,22.08 25.058,22.08 37.058,22.08 49.058,22.08 8.611,22.809 8.712,24.562 7.874,25.476 27.058,26.08 31.058,26.08 35.058,26.08 43.058,26.08 47.058,26.08 9.017,26.949 5.058,30.08 9.058,30.08 13.058,30.08 37.058,30.08 49.058,30.08 9.881,34.061 3.058,34.08 7.058,34.08 23.058,34.08 27.058,34.08 31.058,34.08 43.058,34.08 21.058,38.08 25.058,38.08 29.058,38.08 33.058,38.08 37.058,38.08 49.058,38.08 3.058,42.08 23.058,42.08 27.058,42.08 31.058,42.08 39.058,42.08 9.058,46.08 13.058,46.08 29.058,46.08 33.058,46.08 37.058,46.08 41.058,46.08 49.058,46.08
LED2: MCU.10 R5.6.1 | length 19.9
  Top Layer w0.152: R5.6.1 15.961,3.986 23,11.025 MCU.10
LED3: MCU.11 R5.3.1 | length 17.8
  Top Layer w0.152: MCU.11 23.8,13.361 25.781,11.38 R5.3.1
LED_Header: MCU.12 R5.9.1 | length 18.2
  Top Layer w0.152: MCU.12 24.6,13.955 27.768,10.787 R5.9.1
NetBATT_2: BATT.2 D4.2
NetC2.1_1: C2.1.1 R2.1.1 U3.3 | length 13.1
  Top Layer w0.152: U3.3@10.843,14.478 U3.3 v1(12.827,14.478) ; R2.1.1 v1(12.573,19.964)
  Top Layer w0.508: C2.1.1 9.7,13.335 U3.3@10.843,14.478
  Bottom Layer w0.152: v1@12.573,19.812 12.573,19.691 12.827,19.437 v1(12.827,14.478)
NetC2.2_1: C2.2.1 R2.2.2 U3.1 U3.5 | length 10.8
  Top Layer w0.152: C2.2.1 9.409,18.045 R2.2.2 10.009,17.677 10.184,17.677 10.843,17.018 12.084,17.018 12.185,16.917 U3.1@12.185,16.771 ; U3.5@15.501,13.455 15.501,13.309 15.602,13.208 U3.5
  Top Layer w0.508: U3.1@12.185,16.771 U3.5@15.501,13.455
NetC2.2_2: C2.2.2 R2.2.1 R2.3.2 U3.2 | length 8.7
  Top Layer w0.152: R2.3.2@4.064,18.669 4.064,18.619 6.438,16.245 C2.2.2 9.491,16.245 R2.2.1 9.988,15.748 U3.2
NetC2.3_1: C2.3.1 R2.3.1 | length 1.8
  Top Layer w0.152: R2.3.1@2.114,18.669 2.159,18.714 C2.3.1
NetC2.4_1: C2.4.1 R2.4.2 R2.6.2 U3.7 | length 6.7
  Top Layer w0.508: U3.7 R2.4.2@18.46,15.748 ; R2.4.2@18.431,16.039 R2.6.2 ; R2.4.2 18.542,16.039 18.927,15.655 20.308,15.655 C2.4.1@20.32,15.643
NetC2.4_2: C2.4.2 R2.4.1 R2.5.2 U3.6 | length 6.9
  Top Layer w0.152: U3.6 17.73,14.478 18.492,13.716 R2.4.1 C2.4.2@20.193,13.716 ; C2.4.2@20.32,13.843 20.365,13.798 R2.5.2
NetC2.5_1: C2.5.1 R2.5.1 | length 2.4
  Top Layer w0.152: C2.5.1 18.39,11.227 R2.5.1
NetLED2_1: LED2.1 Q2.3 | length 1.3
  Top Layer w0.152: LED2.1 9.735,3.637 9.901,3.637 Q2.3@10.491,3.046 ; Q2.3@10.618,3.046 Q2.3
NetLED2_2: LED2.2 R5.5.2 | length 1.5
  Top Layer w0.152: R5.5.2 8.227,2.246 LED2.2@9.449,2.246
NetLED3_1: LED3.1 Q3.3 | length 1.4
  Top Layer w0.152: LED3.1@19.431,3.846 19.641,3.637 19.861,3.637 20.429,3.069 Q3.3
NetLED3_2: LED3.2 R5.2.2 | length 1.5
  Top Layer w0.152: R5.2.2@18.034,2.071 18.209,2.246 LED3.2@19.431,2.246
NetLED_1: LED.1 Q1.3 | length 2.8
  Top Layer w0.152: Q1.3 35.56,3.048 LED.1
NetLED_2: LED.2 R5.8.2 | length 2.8
  Top Layer w0.152: R5.8.2 38.354,5.166 LED.2
NetMCU_31: MCU.31 R3.3.2 | length 2.1
  Top Layer w0.152: R3.3.2 22.516,30.988 23,30.504 MCU.31
NetPower_2: PWR.2 R5.1.2 | length 1.9
  Top Layer w0.152: PWR.2 31.432,36.604 R5.1.2
NetQ1_1: Q1.1 R5.9.2 R5.10.1 | length 3.2
  Top Layer w0.152: R5.10.1 29.677,3.896 R5.9.2 29.779,3.998 Q1.1
NetQ2_1: Q2.1 R5.6.2 R5.7.1 | length 4.2
  Top Layer w0.152: Q2.1 12.718,2.096 12.928,2.306 12.928,2.803 14.011,3.886 R5.6.2 R5.7.1
NetQ3_1: Q3.1 R5.3.2 R5.4.1 | length 3.1
  Top Layer w0.152: Q3.1 23.792,2.119 R5.4.1 R5.3.2
RADAR_ADC: ADC.1 MCU.8 R2.6.1 | length 9
  Top Layer w0.152: ADC.1 19.166,21.057 20.243,22.133 MCU.8@20.406,22.133 ; MCU.8@20.381,22.027 20.553,22.2 MCU.8
  Top Layer w0.508: R2.6.1 MCU.8@20.381,22.027
RESET_BUTTON: C4.1.1 MCU.4 R4.1.2 SW1.1 | length 34.9
  Top Layer w0.152: MCU.4 v1(22.098,25.4) ; v1(28.956,30.353) 35.855,37.252 R4.1.2 35.855,46.269 SW1.1@33.773,48.351 ; C4.1.1 31.561,47.727 32.449,47.727 33.073,48.351 SW1.1
  Bottom Layer w0.152: v1(22.098,25.4) 24.003,25.4 v1(28.956,30.353)
SCL: Display.3 MCU.19 R3.2.1 | length 19.8
  Top Layer w0.152: MCU.19 29.69,23.8 30.472,23.018 33.527,23.018 35.357,21.188 35.357,19.193 36.877,17.673 Display.3
SDA: Display.4 MCU.18 R3.1.2 | length 21.7
  Top Layer w0.152: MCU.18 29.791,23 30.078,22.713 33.401,22.713 35.027,21.087 35.027,17.029 36.907,15.148 R3.1.2 36.982,15.173 Display.4
SWCLK: MCU.24 ST-Link.3 | length 19.2
  Top Layer w0.152: MCU.24 36.055,27.8 40.767,32.512 ST-Link.3
SWDIO: MCU.23 ST-Link.2 | length 18.5
  Top Layer w0.152: MCU.23 36.391,27 39.363,29.972 ST-Link.2
USART_RX: MCU.6 Serial.3 | length 18.5
  Top Layer w0.152: Serial.3 v1(8.712,23.698) ; v1(19.685,23.749) 19.711,23.775 20.849,23.775 MCU.6
  Bottom Layer w0.152: v1(8.712,23.698) 8.738,23.724 19.66,23.724 v1(19.685,23.749)
USART_TX: MCU.5 Serial.2 | length 19.1
  Top Layer w0.152: Serial.2 v1(8.712,26.238) ; v1(19.695,24.648) 19.719,24.624 20.85,24.624 MCU.5
  Bottom Layer w0.152: v1(8.712,26.238) 18.105,26.238 v1(19.695,24.648)
VBAT: C1.1.2 D4.1 VBAT_LDO.1 | length 10.5
  Top Layer w0.508: C1.1.2 8.047,43.491 8.047,48.445 8.345,48.743 12.231,48.743 12.827,48.147 D4.1
pads on no net: 5V_Diode.8 BATT. MCU.2 MCU.3 MCU.7 MCU.9 MCU.20 MCU.21 MCU.22 MCU.26 MCU.27 MCU.28 MCU.29 MCU.30 SW1.2 SW1.4

## Polygon pours and split planes (outlines as drawn)
NetBATT_2 on Top Layer "Top Layer-NetBATT_2" (solid, pour order 2): 11.557,42.164 18.669,42.164 18.669,47.371 14.986,47.371 14.986,45.72 11.557,45.72
GND on Top Layer "GND_L01_P009" (solid, remove dead copper, pour order 9): 0,4 ccw(c3.936,4.063) 4,0.127 46,0.127 ccw(c46.082,4.082) 50.038,4 50.038,46 ccw(c46,46) 46,50.038 4,50.038 ccw(c4.019,46.019) 0,46
GND on Bottom Layer "GND_L04_P010" (solid, remove dead copper, pour order 10): 0,4 ccw(c3.936,4.063) 4,0.127 46,0.127 ccw(c46.082,4.082) 50.038,4 50.038,46 ccw(c46,46) 46,50.038 4,50.038 ccw(c4.019,46.019) 0,46
GND on Layer 2 (split plane): 46.252,49.521 46.502,49.494 46.75,49.449 46.994,49.387 47.234,49.307 47.466,49.211 47.692,49.098 47.908,48.969 48.115,48.826 48.311,48.668 48.496,48.496 48.668,48.311 48.826,48.115 48.969,47.908 49.098,47.692 49.211,47.466 49.307,47.234 49.387,46.994 49.449,46.75 49.494,46.502 49.521,46.252 49.529,46.016 49.528,46 49.528,4 49.522,3.837 49.495,3.592 49.452,3.35 49.391,3.111 49.313,2.878 49.219,2.65 49.109,2.43 48.983,2.218 48.843,2.016 48.688,1.825 48.521,1.644 48.34,1.477 48.149,1.322 47.947,1.182 47.735,1.056 47.515,0.946 47.287,0.852 47.054,0.774 46.815,0.713 46.573,0.67 46.328,0.643 46.082,0.634 46.011,0.637 46.011,0.636 46.01,0.636 46,0.637 4,0.637 3.994,0.637 3.992,0.637 3.936,0.635 3.692,0.644 3.449,0.67 3.208,0.713 2.971,0.774 2.738,0.851 2.512,0.945 2.293,1.054 2.083,1.179 1.882,1.319 1.691,1.472 1.512,1.639 1.345,1.818 1.192,2.009 1.052,2.21 0.927,2.42 0.818,2.639 0.724,2.865 0.647,3.098 0.586,3.335 0.543,3.576 0.517,3.819 0.51,3.997 0.51,4 0.51,46 0.508,46.021 0.517,46.269 0.544,46.519 0.588,46.765 0.65,47.008 0.73,47.246 0.826,47.477 0.938,47.702 1.066,47.917 1.209,48.123 1.366,48.318 1.537,48.501 1.72,48.672 1.915,48.829 2.121,48.972 2.336,49.1 2.561,49.212 2.792,49.308 3.03,49.388 3.273,49.45 3.519,49.494 3.769,49.521 3.989,49.529 4,49.528 46,49.528 46.016,49.529
GND on Layer 1 (split plane): 46.252,49.521 46.502,49.494 46.75,49.449 46.994,49.387 47.234,49.307 47.466,49.211 47.692,49.098 47.908,48.969 48.115,48.826 48.311,48.668 48.496,48.496 48.668,48.311 48.826,48.115 48.969,47.908 49.098,47.692 49.211,47.466 49.307,47.234 49.387,46.994 49.449,46.75 49.494,46.502 49.521,46.252 49.529,46.016 49.528,46 49.528,4 49.522,3.837 49.495,3.592 49.452,3.35 49.391,3.111 49.313,2.878 49.219,2.65 49.109,2.43 48.983,2.218 48.843,2.016 48.688,1.825 48.521,1.644 48.34,1.477 48.149,1.322 47.947,1.182 47.735,1.056 47.515,0.946 47.287,0.852 47.054,0.774 46.815,0.713 46.573,0.67 46.328,0.643 46.082,0.634 46.011,0.637 46.011,0.636 46.01,0.636 46,0.637 4,0.637 3.994,0.637 3.992,0.637 3.936,0.635 3.692,0.644 3.449,0.67 3.208,0.713 2.971,0.774 2.738,0.851 2.512,0.945 2.293,1.054 2.083,1.179 1.882,1.319 1.691,1.472 1.512,1.639 1.345,1.818 1.192,2.009 1.052,2.21 0.927,2.42 0.818,2.639 0.724,2.865 0.647,3.098 0.586,3.335 0.543,3.576 0.517,3.819 0.51,3.997 0.51,4 0.51,46 0.508,46.021 0.517,46.269 0.544,46.519 0.588,46.765 0.65,47.008 0.73,47.246 0.826,47.477 0.938,47.702 1.066,47.917 1.209,48.123 1.366,48.318 1.537,48.501 1.72,48.672 1.915,48.829 2.121,48.972 2.336,49.1 2.561,49.212 2.792,49.308 3.03,49.388 3.273,49.45 3.519,49.494 3.769,49.521 3.989,49.529 4,49.528 46,49.528 46.016,49.529

## Other copper
Top Layer:
  rectangle net +5: 16.104,39.243 16.942,40.513
  rectangle net +5: 15.494,40.386 17.526,40.64

## Silkscreen, mask and mechanical layers (free items; w line width, h text height)
Top Overlay:
  lines w0.15: 3.988,12.04 8.484,12.04
  text "VBAT" at 5.613,44.476 h1 r270
  text "+" at 14.17,41.639 h1
  text "-" at 21.944,41.612 h1
  text "GND" at 41.856,34.414 h1
  text "CLK" at 41.831,32.052 h1
  text "SWDIO" at 40.078,29.486 h1
  text "GND" at 4.188,28.242 h1
  text "5V" at 42.847,26.768 h1
  text "TX" at 4.162,25.778 h1
  text "RX" at 4.188,23.212 h1
  text "GND" at 38.681,22.146 h1
  text "3V3" at 38.681,19.656 h1
  text "SCL" at 38.706,17.167 h1
  text "5V" at 4.366,15.516 h1
  text "SDA" at 38.732,14.653 h1
  text "GND" at 4.391,10.462 h1
  text "X-BAND RADAR" at 24.663,10.211 h1.4
  text "V1.0" at 24.917,8.153 h1.4
  text "GND" at 4.416,7.947 h1
  text "+" at 39.316,4.402 h1
  text "-" at 34.339,4.121 h1
Bottom Overlay:
  text "Designed by Dylan Cunliffe" at 43.383,10.211 h1.52
  text "UBC Electrical Engineering" at 43.383,7.188 h1.52